# Altium PCB merigold_v1.PcbDoc
Units mm, origin at the board's own origin, x right, y up, seen from the top; angles counter-clockwise.
Board outline 99.57 x 99.57 mm, 2 copper layers (Top Layer, Bottom Layer), stack 0.325 mm thick; 27 components, 21 nets, 129 pads, 50 vias.
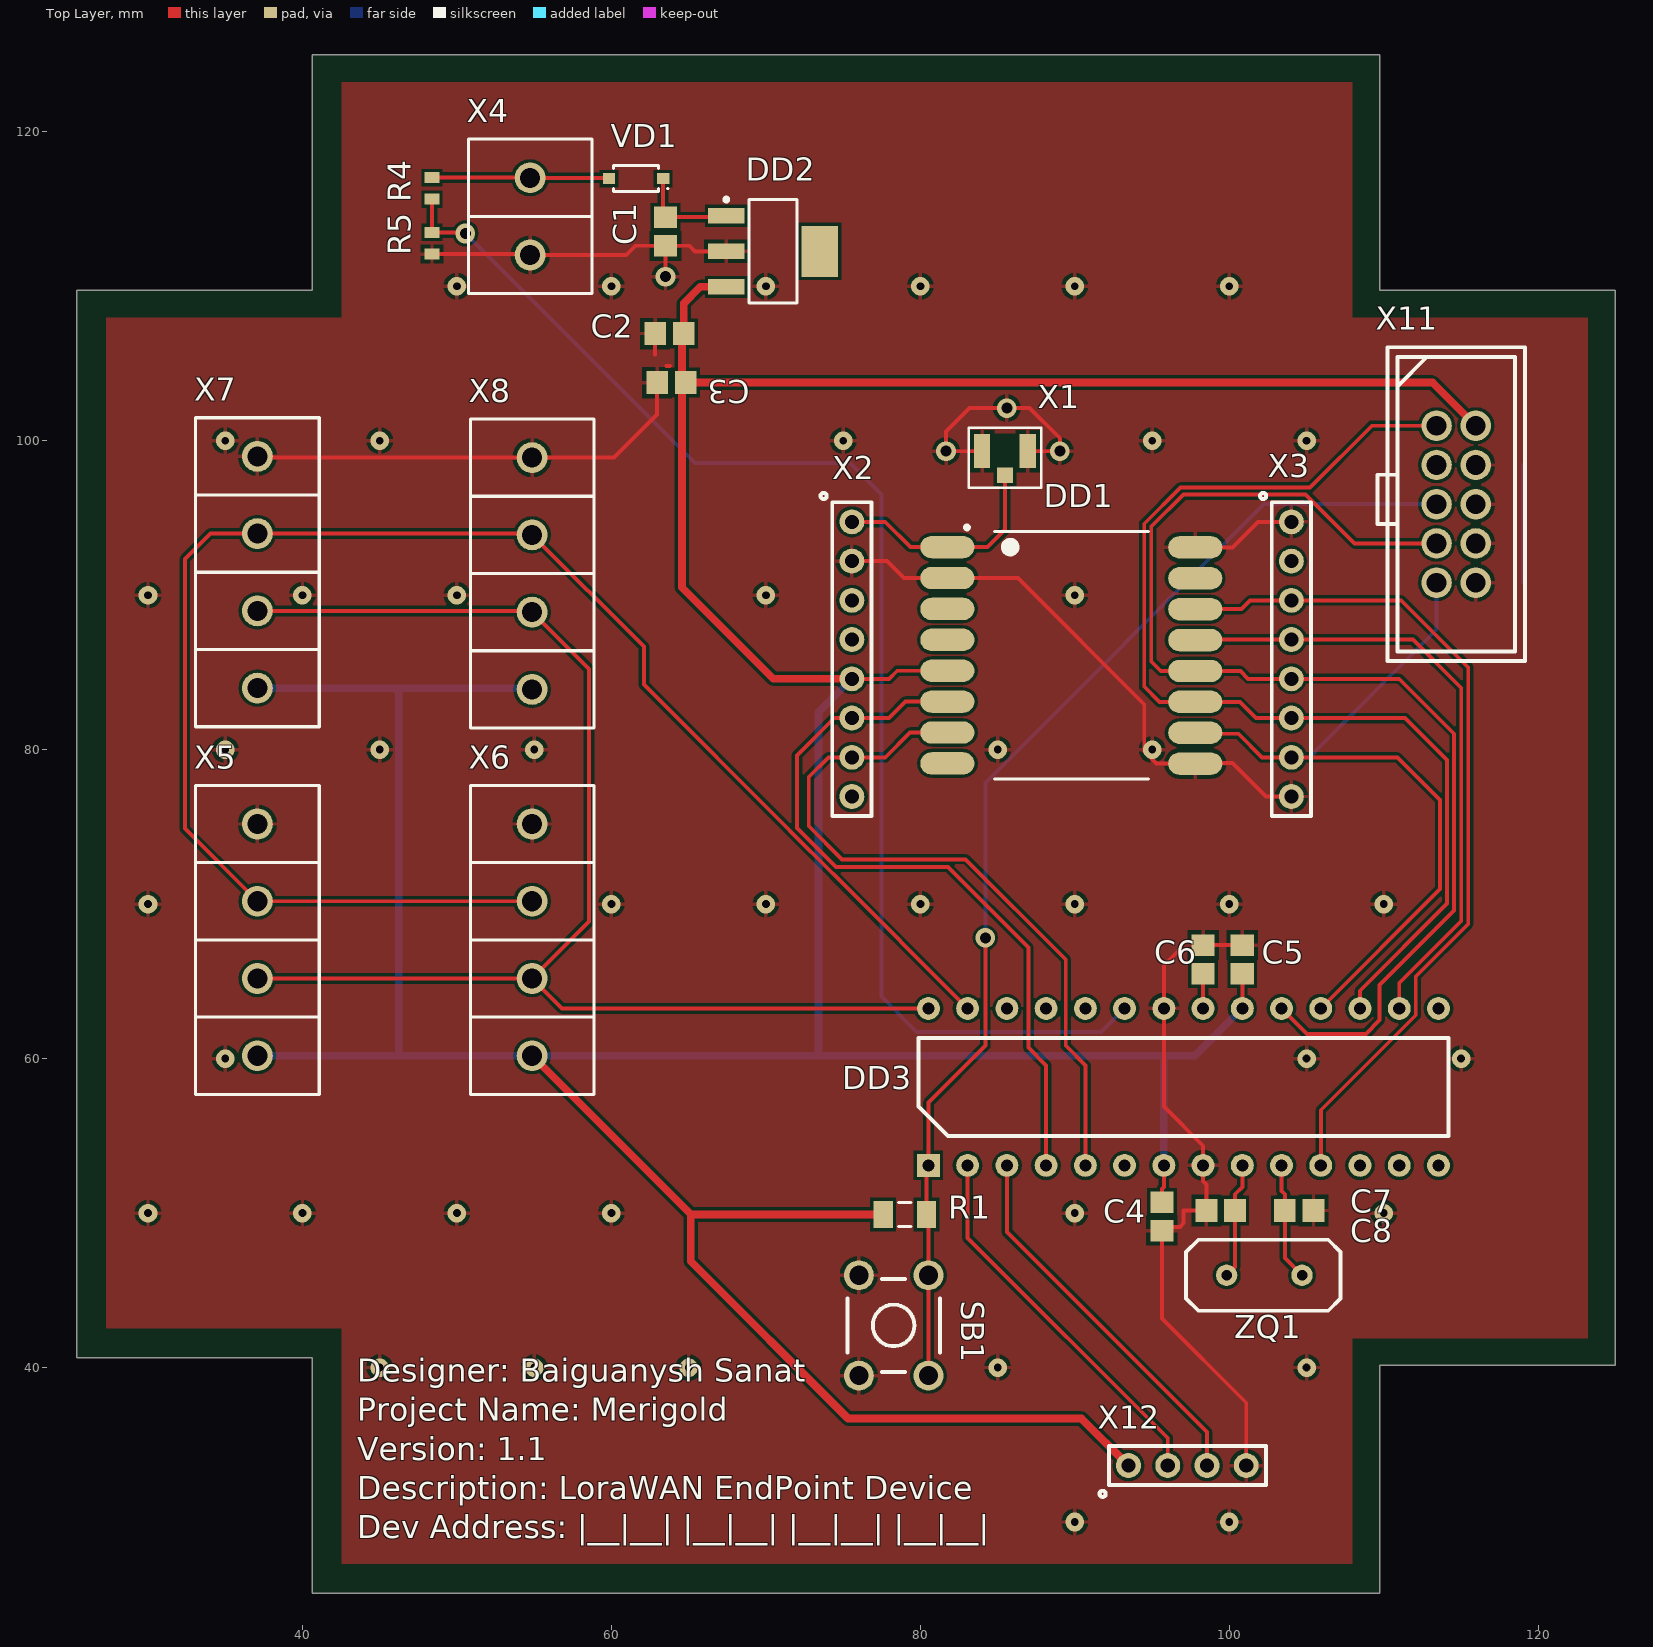
[diagram p0: Top Layer view]
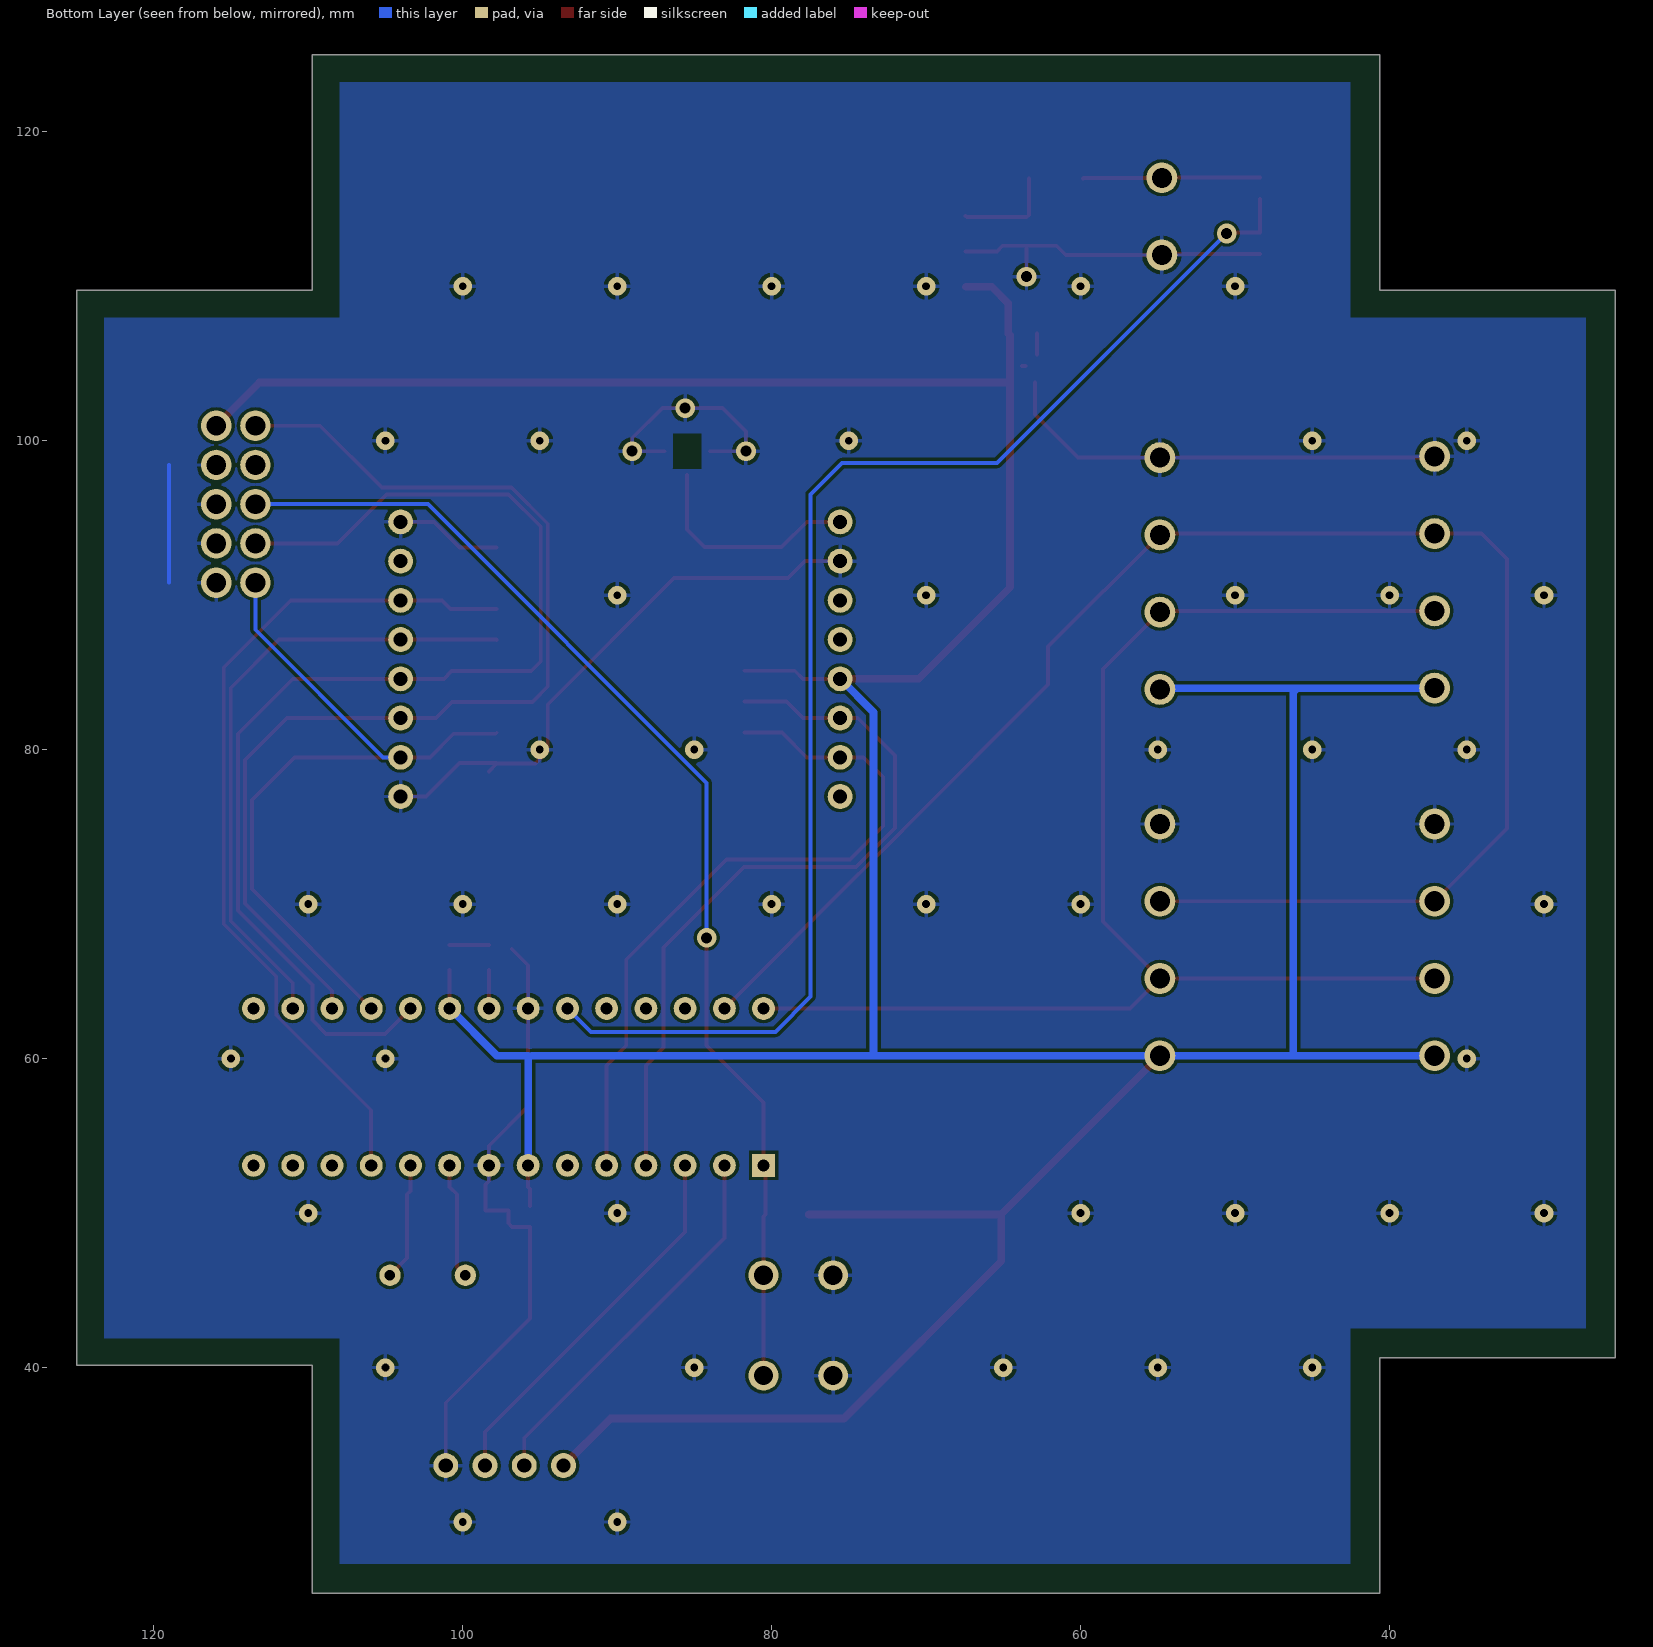
[diagram p1: Bottom Layer view, seen from below]

## Layer stack, top to bottom
Top Solder: solder mask 0.0102, Solder Resist, Dk 3.5
Top Layer: signal copper 0.0356
Dielectric 1: core 0.254, FR-4, Dk 4.2
Bottom Layer: signal copper 0.0356
Bottom Solder: solder mask 0.0102, Solder Resist, Dk 3.5

## Board outline
25.4,40.64 25.4,109.728 40.64,109.728 40.64,124.968 109.728,124.968 109.728,109.728 124.968,109.728 124.968,40.132 109.728,40.132 109.728,25.4 40.64,25.4 40.64,40.64

## Design rules (kind name [scope] priority, off if disabled: settings)
Clearance [All] p1: gap=0.2 ignorepadtopadclearanceinfootprint=FALSE
PolygonConnect [All] p1: connectstyle=Relief reliefconductorwidth=0.254 reliefentries=4 polygonreliefangle="90 Angle" airgapwidth=0.254
RoomDefinition merigold [InComponentClass('merigold')] p1: confinementstyle=ConfineIn formatcopy=TRUE lockcomponents=FALSE outline 0,0 154.051,0 154.051,142.113 0,142.113
RoutingVias [All] p1: holewidth=0.711 width=1.27 viastyle="Through Hole" minholewidth=0.711 minwidth=1.27 maxholewidth=0.711 maxwidth=1.27
SolderMaskExpansion [All] p1: expansion=0.102
Width Width_+3V3 [InNet('+3V3')] p1: maxlimit=2 minlimit=0.254 preferedwidth=0.254
Width [All] p2: maxlimit=0.254 minlimit=0.254 preferedwidth=0.254
30 further rules are at their usual default settings.

## Components (designator, comment, footprint, x,y, rotation, side; value= is the part's Value field where it differs from the comment)
C1 "10U10V_CAPC" CAPC2012X14M/0805 63.5,113.538 r90 top
C2 "10U10V_CAPC" CAPC2012X14M/0805 63.754,106.934 r0 top
C3 "1U16V_CAPC" CAPC2012X14M/0805 63.881,103.759 r0 top
C4 "1U16V_CAPC" CAPC2012X14M/0805 95.631,49.784 r90 top
C5 "1U16V_CAPC" CAPC2012X14M/0805 98.298,66.421 r90 top
C6 "1U16V_CAPC" CAPC2012X14M/0805 100.838,66.421 r90 top
C7 "22P250V_CAPC" CAPC2012X14M/0805 99.441,50.165 r0 top
C8 "22P250V_CAPC" CAPC2012X14M/0805 104.521,50.165 r180 top
DD1 "HPD13A (RFM95)" SOJ200P1600X200-16M 89.789,86.106 r0 top
DD2 "LM1117MPX-3.3/NOPB" SOT230P700X180-4M 70.462,112.254 r0 top
DD3 "ATMEGA328" PDIP28 80.518,53.086 r90 top
R1 "10K1206" RESC3216X07N/1206 78.994,49.911 r180 top
R4 "100K0603" RESC1608X06N/0603 48.387,116.332 r90 top
R5 "100K0603" RESC1608X06N/0603 48.387,112.776 r90 top
SB1 "BTN_TACTILE_6X6" BTN_TACTILE_6X6 76.018,39.474 r90 top
VD1 "MBR120VLSFT1G" SOD-123 61.595,116.967 r180 top
X1 "U.FL-R-SMT-1_sch" U.FL-R-SMT-1 85.471,99.314 r0 top
X2 "PLS_8" PLS_8 75.565,94.742 r0 top
X3 "PLS_8" PLS_8 104.013,94.742 r0 top
X4 "2EDGV-5.0-02P" 2EDGV-5.0-02P 54.737,117.014 r270 top
X5 "2EDGV-5.0-04P" 2EDGV-5.0-04P 37.084,60.184 r90 top
X6 "2EDGV-5.0-04P" 2EDGV-5.0-04P 54.864,60.184 r90 top
X7 "2EDGV-5.0-04P" 2EDGV-5.0-04P 37.084,83.98 r90 top
X8 "2EDGV-5.0-04P" 2EDGV-5.0-04P 54.864,83.9 r90 top
X11 "ISP" 302_SERIES_10POS 113.411,100.965 r0 top
X12 "61300411121" PLS_4 93.472,33.655 r90 top
ZQ1 "HC49U-8-30-50-70-30-ATF" XTAL1050X465X350 104.702,45.974 r180 top

## Footprints (in the part's own frame and the unit in brackets; to place one, negate y for a bottom-side part, rotate by r counter-clockwise, add the part's x,y. Pads: shape width x height; smd on the part's side, far side on the other; paste and mask are expansions set on the pad)
2EDGV-5.0-02P [mm]
  round 2 hole 1.3: 1(0,0) 2(5,0)
  silkscreen extent -2.5,-4 7.5,4, body extent -2.5,-4 7.5,4, height 12
2EDGV-5.0-04P [mm]
  round 2 hole 1.3: 1(0,0) 2(5,0) 3(10,0) 4(15,0)
  silkscreen extent -2.5,-4 17.5,4, body extent -2.5,-4 17.5,4, height 12
302_SERIES_10POS [mm] "2.54MM DUAL ROW VERTICAL BOX HEADER"
  round 1.97 hole 1.27: 1(0,0) 2(2.54,0) 3(0,-2.54) 4(2.54,-2.54) 5(0,-5.08) 6(2.54,-5.08) 7(0,-7.62) 8(2.54,-7.62) 9(0,-10.16) 10(2.54,-10.16)
  silkscreen extent -3.81,-15.24 5.71,5.08
BTN_TACTILE_6X6 [mm] "SWITCH TACTILE SPST-NO 0.05A 24V"
  round 1.94 hole 1.24: 1(0,0) 2(6.5,0) 3(0,-4.5) 4(6.5,-4.5)
  silkscreen extent 0.25,-5.25 6.25,0.75, body extent 0.25,-5.25 6.25,0.75, height 8
CAPC2012X14M/0805 [mm] "Chip Capacitor, 2-Leads, Body 2,00x1,25mm, IPC Low Density"
  rect 1.4x1.5 smd: 1(-0.925,0) 2(0.925,0)
  body extent -1,-0.63 1,0.63, height 1.35
PDIP28 [mm] "Plastic Dual  Inline Package 28-lead"
  rect 1.483x1.483 hole 0.783: 1(0,0)
  round 1.483 hole 0.783: 2(0,-2.54) 3(0,-5.08) 4(0,-7.62) 5(0,-10.16) 6(0,-12.7) 7(0,-15.24) 8(0,-17.78) 9(0,-20.32) 10(0,-22.86) 11(0,-25.4) 12(0,-27.94) 13(0,-30.48) 14(0,-33.02) 15(10.16,-33.02) 16(10.16,-30.48) 17(10.16,-27.94) 18(10.16,-25.4) 19(10.16,-22.86) 20(10.16,-20.32) 21(10.16,-17.78) 22(10.16,-15.24) 23(10.16,-12.7) 24(10.16,-10.16) 25(10.16,-7.62) 26(10.16,-5.08) 27(10.16,-2.54) 28(10.16,0)
  silkscreen extent 1.91,-33.66 8.26,0.64, body extent 1.27,-33.66 8.89,0.64, height 4.57
PLS_4 [mm]
  round 1.61 hole 0.91: 1(0,0) 2(0,-2.54) 3(0,-5.08) 4(0,-7.62)
  silkscreen extent -2.03,-8.89 1.27,1.88
PLS_8 [mm]
  round 1.61 hole 0.91: 1(0,0) 2(0,-2.54) 3(0,-5.08) 4(0,-7.62) 5(0,-10.16) 6(0,-12.7) 7(0,-15.24) 8(0,-17.78)
  silkscreen extent -2.03,-19.05 1.27,1.88
RESC1608X06N/0603 [mm] "Chip Resistor, 2-Leads, Body 1,60x0,82mm, IPC Medium Density"
  rect 0.7x0.95 smd: 1(-0.7,0) 2(0.7,0)
  body extent -0.85,-0.48 0.85,0.48, height 0.6
RESC3216X07N/1206 [mm] "Chip Resistor, 2-Leads, Body 3,20x1,60mm, IPC Medium Density"
  rect 1.25x1.75 smd: 1(-1.4,0) 2(1.4,0)
  silkscreen extent -0.4,-0.77 0.4,0.77, body extent -1.68,-0.87 1.68,0.87, height 0.71
SOD-123 [mm] "SODFL, 2-Leads, Body 1,55x3,70mm, IPC Medium Density"
  rect 0.8x0.7 smd: A(1.75,0) K(-1.75,0)
  silkscreen extent -2.1,-0.85 1.45,0.85, body extent -1.42,-0.85 1.43,0.85, height 1.35
SOJ200P1600X200-16M [mm] "SOJ, 16-Leads, Body 16,00x16,00mm, Pitch 2,00mm, IPC Low Density"
  oval 3.5x1.45 smd: 1(-8.045,7) 2(-8.045,5) 3(-8.045,3) 4(-8.045,1) 5(-8.045,-1) 6(-8.045,-3) 7(-8.045,-5) 8(-8.045,-7) 9(8.001,-7.015) 10(8.001,-5.015) 11(8.001,-3.015) 12(8.001,-1.015) 13(8.001,0.985) 14(8.001,2.985) 15(8.001,4.985) 16(8.001,6.985)
  silkscreen extent -6.9,-8 4.97,8.4, body extent -8,-8 8,8, height 2
SOT230P700X180-4M [mm] "SOT223, 4-Leads, Body 6,50x7,00mm (avg), Pitch 2,30mm, IPC Low Density"
  rect 2.35x1 smd: 1(-3.025,2.3) 2(-3.025,0) 3(-3.025,-2.3)
  rect 2.35x3.3 smd: 4(3.025,0)
  silkscreen extent -3.15,-3.35 1.55,3.47, body extent -1.85,-3.35 1.85,3.35, height 1.8
U.FL-R-SMT-1 [mm]
  rect 1.05x1 smd mask+0.051: 1(0,-1.55)
  rect 1.05x2.2 smd mask+0.051: 2(1.475,0) 3(-1.475,0)
  Top Layer pour cut-out: -0.914,1.143 0.889,1.143 0.889,-1.118 0.914,-1.143 -0.914,-1.143
  Bottom Layer pour cut-out: -0.914,1.143 0.889,1.143 0.889,-1.118 0.914,-1.143 -0.914,-1.143
  silkscreen extent -2.35,-2.36 2.35,1.53, body extent -1.5,-1.55 1.5,1.55, height 1.25
XTAL1050X465X350 [mm]
  round 1.38 hole 0.68: 1(0,0) 2(4.88,0)
  silkscreen extent -2.5,-2.3 7.5,2.3, body extent -2.5,-2.3 7.5,2.3, height 3.5

## Part data
C1 C2: "CAP CER 10UF 10V X5R 0805", Capacitance="10 µF", Manufacturer="Samsung Electro-Mechanics", Manufacturer Part Number=CL21A106KPFNNNG
C3 C4 C5 C6: "CAP CER 1UF 16V X7R 0805", Capacitance="1 µF", Manufacturer="Murata Manufacturing", Manufacturer Part Number=GRM21BR71C105KA01K
C7 C8: "CAP CER 22PF 250V C0G/NP0 0805", Capacitance="22 pF", Manufacturer="Murata Manufacturing", Manufacturer Part Number=GRM21A5C2E220JW01
DD1: "RF TXRX MODULE ISM<1GHZ", Manufacturer="RF Solutions", Manufacturer Part Number=RFM95W-868S2, Category="RF/IF and RFID"
DD2: library part AMS1117, "IC REG LIN 3.3V 800MA SOT223-4", Manufacturer="Texas Instruments", Manufacturer Part Number=LM1117MPX-3.3/NOPB
DD3: library part ATMEGA328P-PU, "IC MCU 8BIT 32KB FLASH 28DIP", Manufacturer="Microchip / Atmel", Manufacturer Part Number=ATMEGA328P-PU
R1: "RES SMD 10K OHM 1% 1/4W 1206", Manufacturer=Panasonic, Manufacturer Part Number=ERJ8ENF1002V, Rated Power="0.25 W", Resistance="10 kO", Tolerance (%)="±1 %"
R4 R5: "RES SMD 100K OHM 1% 1/4W 0603", Manufacturer=ESR03EZPF1003, Manufacturer Part Number=ESR03EZPF1003
SB1: "SWITCH TACTILE SPST-NO 0.05A 24V", Manufacturer="TE Connectivity Alcoswitch", Manufacturer Part Number=1825910-6, Pole Throw Configuration=SPST
VD1: "DIODE SCHOTTKY 20V 1A SOD123FL", Manufacturer="ON Semiconductor", Manufacturer Part Number=MBR120VLSFT1G
X1: "CONN U.FL RCPT STR 50 OHM SMD", Manufacturer=Hirose, Manufacturer Part Number=U.FL-R-SMT-1(10), Category="Connectors, Interconnects"
X2 X3: "CONN HEADER VERT 8POS 2.54MM", Manufacturer=Harwin, Manufacturer Part Number=M20-7820842, Category="Connector Headers and PCB Receptacles", Number of Contacts=8, Number of Rows=1, Pitch="2.54 mm"
X4: "TERM BLOCK HDR 2POS VERT 5MM", Manufacturer="Phoenix Contact", Manufacturer Part Number=1753437
X5 X6 X7 X8: "TERM BLOCK HDR 4POS VERT 5MM", Manufacturer="Phoenix Contact", Manufacturer Part Number=1753479
X11: "CONN HEADER VERT 10POS 2.54MM", Manufacturer="On-Shore Technology", Manufacturer Part Number=302-S101, Category="Connectors, Interconnects", ManufacturerPartNumber=302-S101, Number of Positions=10, Number of Rows=2, Pitch="0.100\" (2.54mm)"
X12: library part PLS_4, "CONN HEADER VERT 4POS 2.54MM", Manufacturer="Wurth Electronics", Category="Connectors, Interconnects", Manufacturer Part Number=61300411121, Number of Contacts=3, Number of Positions=3, Number of Rows=1, Pitch="0.100\" (2.54mm)"
ZQ1: "CRYSTAL 8.0MHZ 30PF SMD", Frequency="8 MHz", Load Capacitance="30 pF", Manufacturer="IQD Frequency Products", Category=Crystals, Manufacturer Part Number=HC49U-8-30-50-70-30-ATF

## Via types
v1: diameter 1.2, hole 0.5, Top Layer to Bottom Layer, tented both sides, 44 vias
v2: diameter 1.27, hole 0.711, Top Layer to Bottom Layer, 6 vias

## Nets (pads, with @x,y where several pads share a name; then routed paths per layer and width w, separated by ;. In a path a pad name is that pad's centre, name@x,y a point inside that pad or via, vN(x,y) a via of type N, cw(c..) or ccw(c..) an arc to the next point about the centre after c; other vN are vias at no path point)
+3V3: C2.2 C3.2 C4.2 C6.1 DD1.5 DD2.3 DD3.7 DD3.20 R1.2 X2.5 X5.1 X6.1 X7.1 X8.1 X11.2 X12.1 | length 301.9
  Top Layer w0.254: C2.2@64.561,106.816 C2.2 ; X2.5 77.978,84.582 78.502,85.106 DD1.5 ; C4.2@95.631,50.464 C4.2 95.631,51.562 95.758,51.689 DD3.7 ; DD3.20 C6.1 C6.1@100.838,65.741
  Top Layer w0.5: X6.1 65.137,49.911 ; C2.2@64.561,106.816 C3.2@64.561,103.759 ; C2.2 64.679,108.875 65.758,109.954 DD2.3 ; X2.5 70.485,84.582 64.561,90.506 C3.2@64.561,103.759 ; R1.2 65.137,49.911 ; X12.1 90.424,36.703 75.311,36.703 65.137,46.877 65.137,49.911 ; X11.2 113.157,103.759 C3.2 C3.2@64.561,103.759
  Bottom Layer w0.5: X5.1 46.228,60.184 ; X7.1 45.974,83.98 ; X8.1 54.864,83.98 45.974,83.98 ; X2.5 73.406,82.423 73.406,60.184 ; 95.504,60.184 73.406,60.184 ; DD3.7 95.758,60.184 97.776,60.184 DD3.20 ; 45.974,83.98 46.228,83.726 46.228,60.184 ; 46.228,60.184 X6.1 73.406,60.184
A0: DD3.23 R4.1 R5.2 | length 88.2
  Top Layer w0.254: R4.1 R5.2 50.611,113.476 v2(50.546,113.411)
  Bottom Layer w0.254: v2(50.546,113.411) 65.405,98.552 75.438,98.552 77.47,96.52 77.47,64.008 79.756,61.722 91.694,61.722 DD3.23
ANT: DD1.1 X1.1 X2.1 | length 14.6
  Top Layer w0.254: X2.1 77.724,94.742 79.36,93.106 DD1.1 84.343,93.106 85.471,94.234 X1.1
D2: DD1.6 DD3.4 X2.6 | length 48.6
  Top Layer w0.254: DD1.6 79.042,83.106 77.978,82.042 X2.6 74.422,82.042 72.009,79.629 72.009,74.93 74.549,72.39 81.788,72.39 86.995,67.183 86.995,60.706 88.138,59.563 DD3.4
D3: DD1.7 DD3.5 X2.7 | length 47.4
  Top Layer w0.254: DD1.7 79.328,81.106 77.724,79.502 X2.7 74.041,79.502 72.771,78.232 72.771,75.057 74.93,72.898 82.931,72.898 89.408,66.421 89.408,60.833 90.678,59.563 DD3.5
D5: DD1.14 DD3.11 X3.3 | length 55.9
  Top Layer w0.254: DD1.14 100.775,89.091 101.346,89.662 X3.3 111.125,89.662 115.462,85.325 115.462,68.719 112.066,65.323 112.066,62.803 105.918,56.655 DD3.11
D10: DD1.13 DD3.16 X3.4 | length 40.9
  Top Layer w0.254: DD1.13 97.821,87.122 X3.4 111.887,87.122 115.008,84.001 115.008,68.907 110.998,64.897 DD3.16
D11: DD1.11 DD3.17 X3.6 X11.1 | length 72.1
  Top Layer w0.254: DD3.17 108.458,64.389 114.1,70.031 114.1,79.321 111.379,82.042 X3.6 101.727,82.042 100.678,83.091 DD1.11 95.471,83.091 94.488,84.074 94.488,94.622 96.84,96.974 105.229,96.974 109.22,100.965 X11.1
D12: DD1.10 DD3.18 X3.7 X11.9 | length 50.2
  Top Layer w0.254: DD1.10 97.855,81.026 100.584,81.026 102.108,79.502 X3.7 110.871,79.502 113.646,76.727 113.646,70.974 DD3.18
  Bottom Layer w0.254: X3.7 105.156,79.502 113.411,87.757 X11.9
D13: DD1.12 DD3.19 X3.5 X11.7 | length 78.9
  Top Layer w0.254: DD3.19 105.029,61.595 108.839,61.595 109.728,62.484 109.728,64.77 114.554,69.596 114.554,81.026 110.998,84.582 X3.5 101.219,84.582 100.711,85.09 DD1.12 DD1.12 95.56,85.091 94.942,85.709 94.942,94.434 97.028,96.52 104.93,96.52 108.11,93.34 X11.7@113.411,93.34
GND: C1.1 C2.1 C3.1 C4.1 C5.2 C6.2 C7.1 C8.1 DD1.2 DD1.9 DD1.16 DD2.2 DD3.8 DD3.22 R5.1 SB1.1 SB1.2 X1.2 X1.3 X2.2 X3.1 X3.8 X4.2 X5.4 X6.4 X7.4 X8.4 X11.4 X11.6 X11.8 X11.10 X12.4 | length 161.9
  Top Layer w0.254: X7.4 37.164,98.9 X8.4 60.165,98.9 62.956,101.691 C3.1 ; R5.1 54.675,112.076 X4.2 60.96,112.014 61.559,112.613 C1.1 ; 62.829,105.573 C2.1 ; v2(63.5,110.617) C1.1 ; 63.566,104.836 63.791,104.836 ; DD2.2 65.419,112.254 65.06,112.613 C1.1 ; X2.2 77.851,92.202 78.947,91.106 DD1.2 86.306,91.106 94.488,82.924 94.488,79.883 95.28,79.091 DD1.9 ; X1.3 v2(81.661,99.314) 81.661,100.584 83.185,102.108 v2(85.598,102.108) 87.075,102.108 89.027,100.156 v2(89.027,99.314) X1.2 ; 96.819,67.101 95.758,66.04 DD3.22 95.758,56.896 98.298,54.356 DD3.8 98.298,52.07 98.516,51.852 C7.1 97.042,50.165 97.042,49.337 96.808,49.104 95.631,49.104 C4.1 95.631,43.18 101.092,37.719 X12.4 ; DD1.16 100.203,93.091 101.854,94.742 X3.1 ; C5.2 C6.2 ; DD1.9@98.298,78.583 DD1.9 ; X3.8 102.362,76.962 100.203,79.121 97.82,79.121 DD1.9
  Bottom Layer w0.254: 118.999,90.805 118.999,98.425
  other v1: 90,30 100,30 45,40 55,40 65,40 85,40 105,40 30,50 40,50 50,50 60,50 90,50 110,50 35,60 105,60 115,60 30,70 60,70 70,70 80,70 90,70 100,70 110,70 35,80 45,80 55,80 85,80 95,80 30,90 40,90 50,90 70,90 90,90 35,100 45,100 75,100 95,100 105,100 50,110 60,110 70,110 80,110 90,110 100,110
NetC1_2: C1.2 DD2.1 VD1.K | length 6.5
  Top Layer w0.254: VD1.K 63.345,114.618 C1.2 67.346,114.463 DD2.1
NetC5_1: C5.1 DD3.21 | length 2.5
  Top Layer w0.254: DD3.21 C5.1 C5.1@98.298,65.741
NetC7_2: C7.2 DD3.9 ZQ1.2 | length 7.5
  Top Layer w0.254: ZQ1.2 100.366,46.518 C7.2 100.366,51.217 100.838,51.689 DD3.9
NetC8_2: C8.2 DD3.10 ZQ1.1 | length 7.7
  Top Layer w0.254: DD3.10 103.378,51.435 103.596,51.217 C8.2 103.596,47.08 ZQ1.1
NetR4_2: R4.2 VD1.A X4.1 | length 11.5
  Top Layer w0.254: R4.2 54.719,117.032 X4.1 59.798,117.014 VD1.A
RST: DD3.1 R1.1 SB1.3 SB1.4 X11.5 | length 76.9
  Top Layer w0.254: SB1.3 SB1.4 80.518,49.787 R1.1 80.394,52.962 DD3.1 80.518,57.15 84.201,60.833 v2(84.201,67.818)
  Bottom Layer w0.254: DD3.1@80.394,52.962 DD3.1 ; v2(84.201,67.818) 84.201,77.851 102.235,95.885 X11.5
RXD: DD3.2 X12.2 | length 24.8
  Top Layer w0.254: DD3.2 83.058,48.387 96.012,35.433 X12.2
SCL: DD3.28 X5.2 X6.2 X7.2 X8.2 | length 88.8
  Top Layer w0.254: X5.2 X6.2 ; X7.2 54.784,88.98 X8.2 58.547,85.217 58.547,68.867 X6.2 ; DD3.28 56.802,63.246 X6.2
SDA: DD3.27 X5.3 X6.3 X7.3 X8.3 | length 107.4
  Top Layer w0.254: X6.3 X5.3 32.385,74.883 32.385,92.329 34.036,93.98 X7.3 54.784,93.98 X8.3 62.103,86.661 62.103,84.201 71.555,74.749 71.555,74.742 74.361,71.936 74.368,71.936 DD3.27
TXD: DD3.3 X12.3 | length 24.8
  Top Layer w0.254: DD3.3 85.598,48.768 98.552,35.814 X12.3
pads on no net: DD1.3 DD1.4 DD1.8 DD1.15 DD2.4 DD3.6 DD3.12 DD3.13 DD3.14 DD3.15 DD3.24 DD3.25 DD3.26 X2.3 X2.4 X2.8 X3.2 X11.3

## Polygon pours and split planes (outlines as drawn)
GND on Bottom Layer "Top Overlay-No Net" (solid, pour order 4): 42.545,123.19 42.545,107.95 27.305,107.95 27.305,42.545 42.545,42.545 42.545,27.305 107.95,27.305 107.95,41.91 123.19,41.91 123.19,107.95 107.95,107.95 107.95,123.19
GND on Top Layer "Top Overlay-No Net" (solid, pour order 6): 42.545,123.19 42.545,107.95 27.305,107.95 27.305,42.545 42.545,42.545 42.545,27.305 107.95,27.305 107.95,41.91 123.19,41.91 123.19,107.95 107.95,107.95 107.95,123.19

## Silkscreen, mask and mechanical layers (free items; w line width, h text height)
Top Overlay:
  text "Designer: Baiguanysh Sanat / Project Name: Merigold / Version: 1.1 / Description: LoraWAN EndPoint Device / Dev Address: |__|__| |__|__| |__|__| |__|__|" at 43.561,28.448 h2.54
Board:
  the board outline again, w0.5

## Dimensions
40.64,124.968 to 40.64,25.4 on Mechanical 13
25.4,109.728 to 124.968,109.728 on Mechanical 13